# Altium PCB TX_Board.PcbDoc (part 5 of 5)
Units mm, origin at the board's own origin, x right, y up, seen from the top; angles counter-clockwise.
Board outline 69 x 69 mm, 4 copper layers (Top Layer, Int1 (GND), Int2 (GND), Bottom Layer), stack 1.591 mm thick; 102 components, 48 nets, 289 pads, 82 vias.
Unrouted connection lines stored in the file: 40.
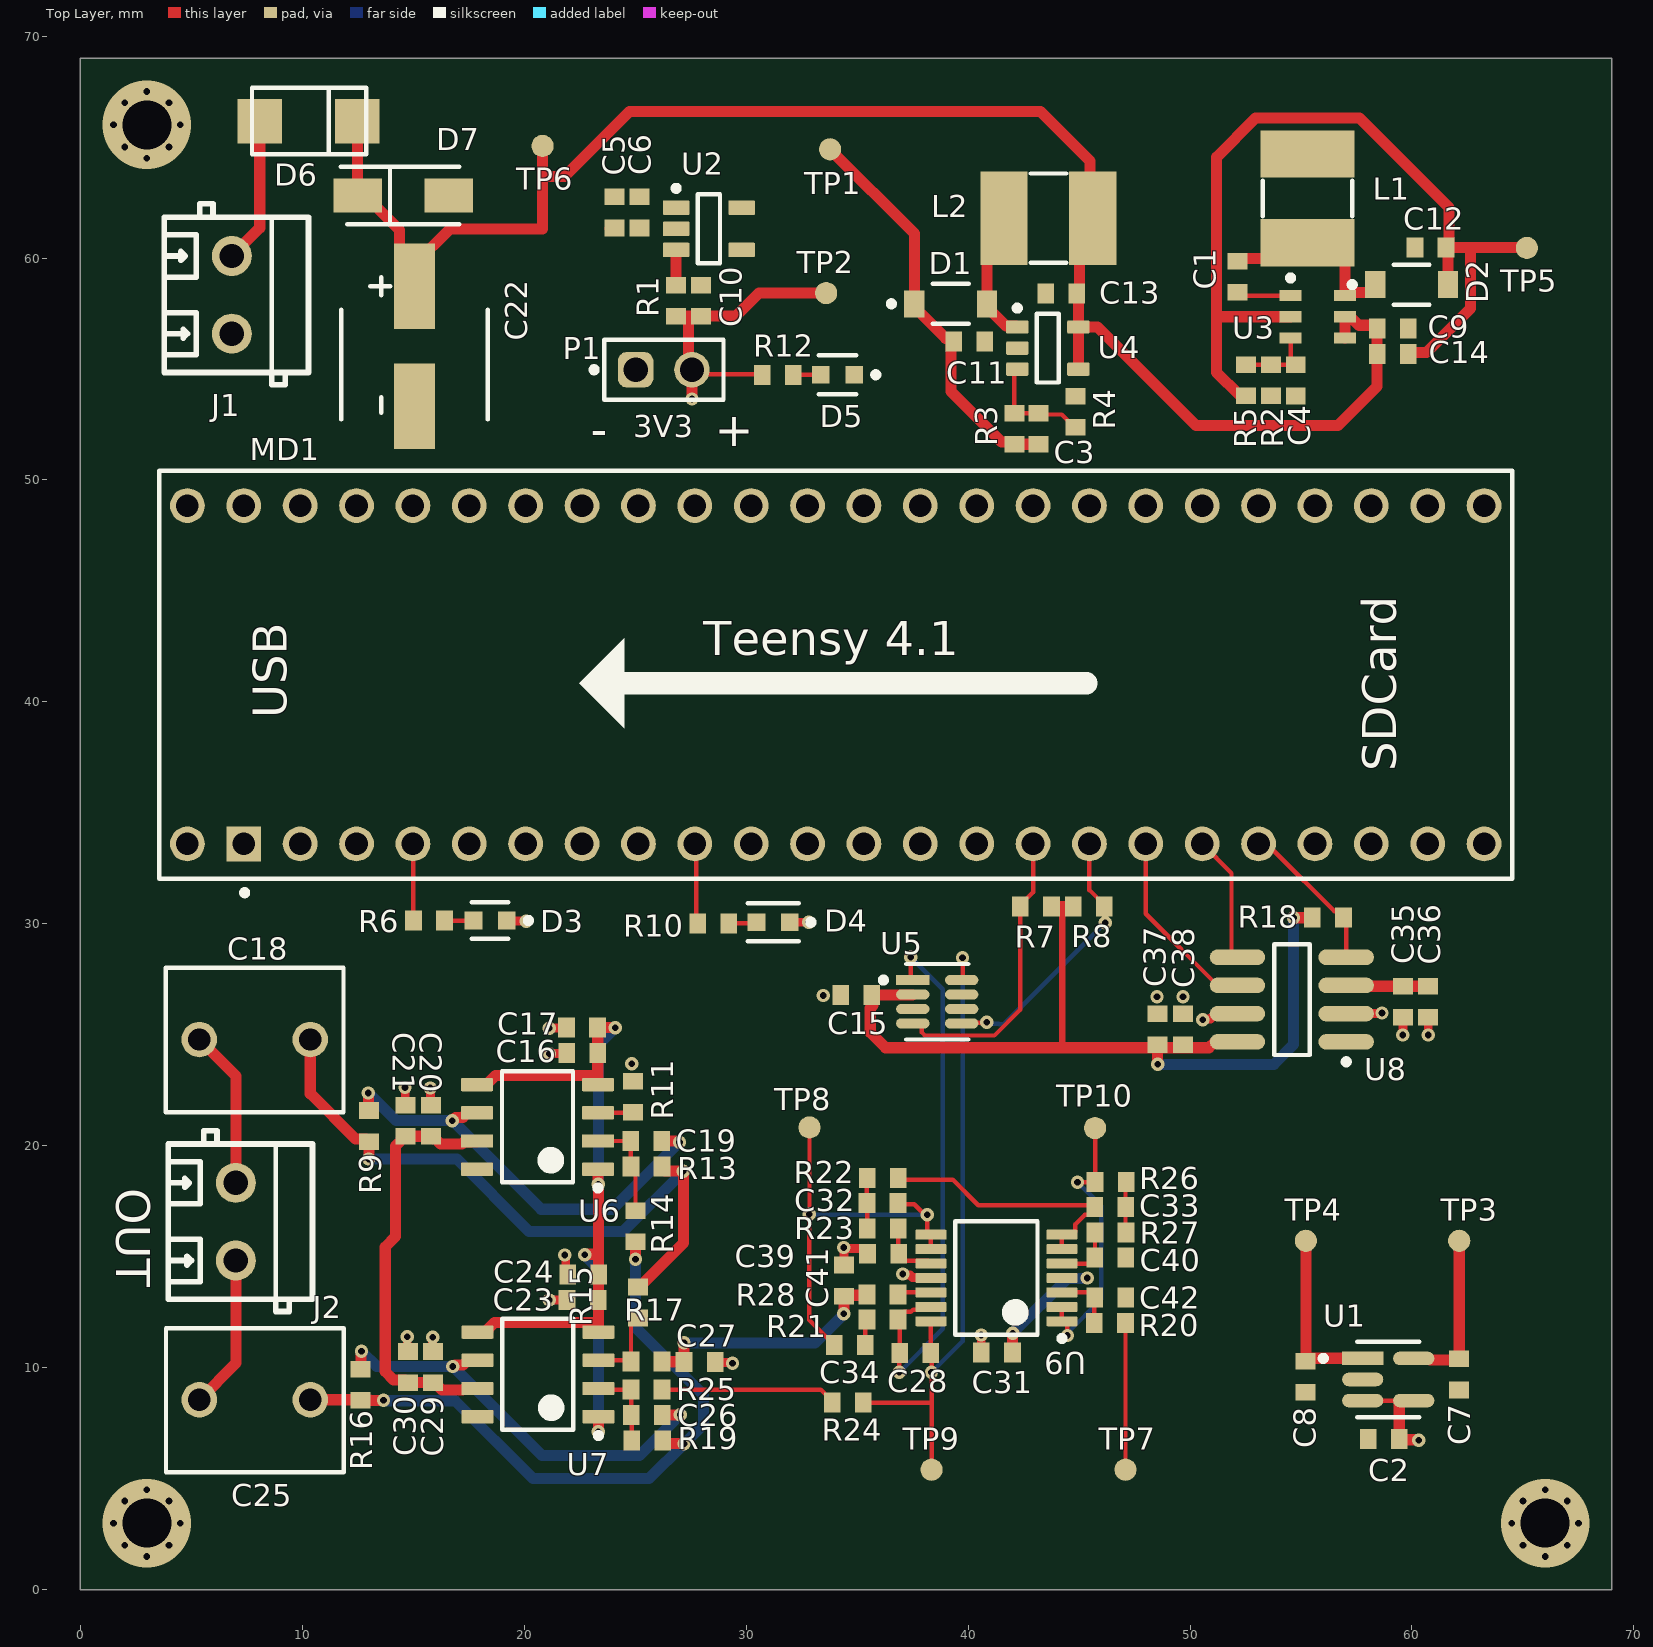
[diagram p0: Top Layer view]

## Via types
v1: diameter 0.6, hole 0.3, Top Layer to Bottom Layer, tented both sides, 79 vias
v2: diameter 4, hole 2.2, Top Layer to Bottom Layer, 3 vias

## Nets (pads, with @x,y where several pads share a name; then routed paths per layer and width w, separated by ;. In a path a pad name is that pad's centre, name@x,y a point inside that pad or via, vN(x,y) a via of type N, cw(c..) or ccw(c..) an arc to the next point about the centre after c; other vN are vias at no path point) (continued)
GND: C2.2 C4.2 C5.1 C6.2 C7.2 C8.2 C9.1 C10.1 C11.1 C12.2 C13.1 C15.2 C16.2 C17.1 C20.2 C21.1 C22.2 C23.2 C24.1 C27.2 C29.2 C30.1 C31.2 C35.2 C36.1 C37.1 C38.2 C39.1 C40.1 C41.2 C42.1 D3.1 D4.1 D5.1 D7.2 J1.2 L1.2 MD1.43 MD1.45 MD1.46 P1.1 R2.2 R4.1 R11.1 U1.2 U2.1 U4.2 U5.3 U5.6 U8.2 U8.7 U9.11 | length 18.1
  Top Layer w0.4: v1(14.63,22.631) 14.643,22.619 14.643,21.846 C21.1 ; C30.1@14.732,10.606 v1(14.732,11.405) ; v1(15.773,22.606) 15.786,22.593 15.786,21.846 C20.2 ; C29.2@15.875,10.606 v1(15.875,11.379) ; D3.1 19.23,30.137 20.079,30.137 v1(20.091,30.124) ; v1(21.133,13.056) C23.2 ; v1(21.133,24.155) 21.145,24.168 21.904,24.168 C16.2 ; v1(21.133,25.298) 21.145,25.311 21.893,25.311 C17.1 ; v1(21.833,15.085) 21.871,15.047 21.871,14.284 C24.1 ; C27.2 28.629,10.236 29.362,10.236 v1(29.388,10.211) ; D4.1 v1(32.817,30.074) ; C41.2 34.404,14.643 34.404,15.405 v1(34.392,15.418) 34.43,15.38 35.295,15.38 35.47,15.205 C39.1 ; v1(37.059,14.224) 37.097,14.186 37.376,14.186 37.49,14.071 38.302,14.071 U9.11 ; v1(40.589,11.481) 40.595,11.475 40.595,10.699 C31.2 ; v1(50.571,25.679) 50.61,25.718 50.916,25.718 51.155,25.956 U8.7 ; U8.2 57.05,25.97 58.635,25.97 v1(58.649,25.984) ; v1(59.588,24.994) C35.2 ; v1(60.731,24.994) C36.1
  other v1: 24.841,23.698 48.514,26.721 49.682,26.721 33.477,26.772
HYD_N: C25.2 J2.2 | length 7
  Top Layer w0.5: C25.2 7.012,10.207 J2.2
HYD_P: C18.2 J2.1 | length 7.1
  Top Layer w0.5: C18.2 7.012,23.141 J2.1
I2C2_SCL: MD1.24 R7.1 U5.4 | length 13.4
  Top Layer w0.2: U5.4 37.802,25.517 37.92,25.399 37.92,25.107 38.057,24.97 41.187,24.97 42.344,26.126 R7.1@42.344,30.785 ; R7.1@42.344,30.835 42.928,31.419 MD1.24
I2C2_SDA: MD1.25 R8.1 U5.5 | length 12.3
  Top Layer w0.2: U5.5 39.737,25.543 40.819,25.543 v1(40.845,25.57) ; MD1.25 45.468,31.523 46.157,30.835 46.157,30.785 46.168,30.774 46.168,30.059 v1(46.179,30.048)
  Bottom Layer w0.2: v1(40.845,25.57) 40.922,25.493 41.39,25.493 41.407,25.476 41.607,25.476 v1(46.179,30.048)
IBuck_CB: C1.1 U3.1 | length 2.4
  Top Layer w0.2: C1.1@52.146,58.329 52.172,58.303 U3.1
IBUCK_FB: C4.1 R2.1 R5.2 U3.3 | length 3.6
  Top Layer w0.2: R5.2 54.748,55.197 C4.1 54.53,55.416 U3.3
IBuck_SW: C1.2 D2.1 L1.1 U3.6 | length 8.7
  Top Layer w0.5: C1.2@52.146,59.984 54.593,59.984 L1.1 56.168,60.687 56.98,59.875 U3.6 57.23,58.303 57.368,58.441 58.137,58.441 58.344,58.649 D2.1
LED_HB: MD1.8 R10.1 | length 3.6
  Top Layer w0.2: MD1.8 27.744,33.548 27.744,30.079 R10.1@27.801,30.023
LED_TX: MD1.3 R6.1 | length 3.5
  Top Layer w0.2: MD1.3 14.993,33.599 14.993,30.155 R6.1@14.999,30.15
LPF_OUT: C32.2 C34.1 TP8.1 U9.8 U9.9 | length 18.8
  Top Layer w0.2: TP8.1 32.856,16.93 v1(32.842,16.916) 32.842,12.152 C34.1 ; C32.2 36.899,17.369 37.574,17.369 38.052,16.891 v1(38.16,16.891) 38.16,16.121 38.285,15.996 U9.8 U9.9
  Bottom Layer w0.2: v1(32.842,16.916) 32.855,16.904 38.148,16.904 v1(38.16,16.891)
NetC19_1: C19.1 R13.2 R14.2 U6.2 | length 4.7
  Top Layer w0.2: U6.2 C19.1 24.802,19.085 R13.2 25.017,18.869 R14.2
NetC26_1: C26.1 R19.1 R25.2 U7.2 | length 3.7
  Top Layer w0.2: U7.2 23.397,9.015 R25.2 ; C26.1 R25.2@24.827,9.001 ; R19.1 C26.1@24.841,7.86
NetC32_1: C32.1 R22.2 R23.1 | length 2.3
  Top Layer w0.2: R22.2 35.444,18.531 C32.1 35.458,17.41 R23.1
NetC33_1: C33.1 R26.2 R27.1 | length 2.3
  Top Layer w0.2: R27.1@47.092,15.848 47.092,18.11 R26.2@47.094,18.112
NetC33_2: C33.2 R22.1 U9.6 U9.7 | length 12.3
  Top Layer w0.2: R22.1 36.93,18.467 39.318,18.467 40.463,17.322 45.631,17.322 C33.2 45.706,17.172 45.431,16.897 45.263,16.897 44.827,16.46 44.827,16.121 44.702,15.996 U9.7 U9.6
NetC34_2: C34.2 R21.1 | length 1.2
  Top Layer w0.2: C34.2 35.371,12.093 R21.1
NetC39_2: C39.2 R23.2 U9.10 | length 2.8
  Top Layer w0.2: R23.2 36.858,15.15 C39.2 ; C39.2@36.87,15.099 37.145,14.824 37.485,14.824 37.488,14.821 38.202,14.821 U9.10
NetC40_2: C40.2 R27.2 U9.5 | length 2.7
  Top Layer w0.2: U9.5 45.441,14.696 C40.2 45.717,14.972 R27.2
NetD3_2: D3.2 R6.2 | length 1.3
  Top Layer w0.2: R6.2@16.399,30.15 D3.2
NetD4_2: D4.2 R10.2 | length 1.3
  Top Layer w0.2: R10.2@29.201,30.023 30.418,30.023 D4.2
NetD5_2: D5.2 R12.2 | length 1.3
  Top Layer w0.2: R12.2@32.107,54.737 D5.2@33.364,54.737
NetR11_2: R11.2 U6.3 | length 1.6
  Top Layer w0.2: U6.3 24.871,21.488 R11.2
NetR15_1: R15.1 R17.2 U7.3 | length 3.6
  Top Layer w0.2: U7.3 24.76,10.338 R17.2 24.813,11.968 25.088,12.243 R15.1
NetR24_2: R24.2 R25.1 | length 8
  Top Layer w0.2: R25.1 33.372,9.015 33.881,8.506 R24.2
NetR28_2: R28.2 U9.12 | length 1.5
  Top Layer w0.2: R28.2 36.931,13.396 U9.12
POT_W: C28.1 R21.2 U5.1 U9.13 | length 25.3
  Top Layer w0.2: R21.2 36.917,12.093 C28.1 36.906,10.657 v1(36.906,9.804) ; R21.2@36.844,12.242 37.119,12.517 37.427,12.517 37.532,12.621 38.202,12.621 U9.13 ; v1(37.414,28.499) 37.414,27.562 U5.1
  Bottom Layer w0.2: v1(36.906,9.804) 38.862,11.76 38.862,27.051 v1(37.414,28.499)
REF_1V5: C8.1 C27.1 C41.1 R17.1 R28.1 TP4.1 U1.1 | length 19.4
  Top Layer w0.5: R17.1 26.225,10.273 27.192,10.273 C27.1 v1(27.203,11.125) ; v1(34.404,12.433) 34.404,13.218 C41.1 34.457,13.27 35.405,13.27 R28.1 ; TP4.1 55.22,10.454 55.194,10.429 U1.1@57.78,10.429
  Bottom Layer w0.5: v1(27.203,11.125) 33.096,11.125 v1(34.404,12.433)
REF_3V: C7.1 C31.1 C35.1 C36.2 TP3.1 U1.5 U8.3 U9.4 | length 16.4
  Top Layer w0.25: U9.4 U9.4@44.232,14.041
  Top Layer w0.5: C31.1 42.006,10.699 42.006,11.551 v1(42.012,11.557) ; U8.3 57.071,27.192 C36.2 ; U1.5 60.732,10.424 60.803,10.353 62.078,10.353 C7.1 TP3.1
  Bottom Layer w0.5: v1(42.012,11.557) 44.482,14.027 45.345,14.027 v1(45.364,14.046)
SPI1_CS: MD1.28 R18.1 U8.4 | length 7.2
  Top Layer w0.2: MD1.28 53.459,33.604 53.836,33.227 53.845,33.227 56.494,30.577 56.812,30.577 57.04,30.349 57.04,30.277 57.036,30.273 U8.4
SPI1_MOSI: MD1.26 U8.6 | length 8.6
  Top Layer w0.2: MD1.26 48.008,30.455 51.236,27.226 U8.6
SPI1_SCK: MD1.27 U8.5 | length 5.8
  Top Layer w0.2: MD1.27 51.869,32.283 51.869,28.727 52.1,28.496 U8.5
TXLVL_OUT: C28.2 R24.1 TP9.1 U5.8 U9.14 | length 30
  Top Layer w0.2: R24.1 38.354,8.431 ; U9.14 38.327,10.677 C28.2 38.354,10.631 v1(38.354,9.804) 38.354,8.431 ; TP9.1 38.354,8.431 ; U5.8 39.751,27.508 v1(39.751,28.473)
  Bottom Layer w0.2: v1(38.354,9.804) 39.751,11.201 v1(39.751,28.473)
VDD: C3.2 C11.2 C20.1 C21.2 C29.1 C30.2 D1.1 R3.2 TP1.1 U6.7 U7.7 | length 36.9
  Top Layer w0.5: C29.1 C30.2 14.632,9.458 14.11,9.458 13.741,9.827 13.741,15.443 14.207,15.909 14.207,19.984 14.456,20.233 14.456,20.308 14.581,20.433 C20.1 15.924,20.308 15.999,20.308 16.224,20.083 17.199,20.083 17.285,20.168 17.826,20.168 U6.7 ; C29.1@15.975,9.333 16.3,9.008 17.224,9.008 17.234,9.018 17.844,9.018 U7.7 ; TP1.1 37.579,61.1 D1.1 ; D1.1@37.579,57.785 38.979,56.386 39.15,56.386 39.228,56.308 39.228,53.99 41.514,51.704 42.057,51.704 R3.2@42.058,51.703 ; R3.2 C3.2
VIN: C5.2 C6.1 C9.2 C13.2 C14.2 C22.1 D6.K D7.1 L2.1 TP6.1 U2.2 U3.4 U3.5 U4.4 U4.5 | length 77.6
  Top Layer w0.5: D6.K 12.487,62.831 D7.1 12.829,62.814 14.387,61.256 14.387,59.4 C22.1 15.062,59.725 16.648,61.311 20.828,61.311 20.828,63.856 ; TP6.1 20.828,63.856 ; C5.2@23.876,61.337 C5.2@23.881,61.332 ; C6.1@25.192,61.357 C6.1 ; U4.4 U4.5 ; U3.4 U3.5 57.23,57.353 57.613,56.97 58.226,56.97 C9.2@58.303,56.892 ; C9.2 58.431,54.215 56.667,52.451 50.267,52.451 45.827,56.891 U4.5 ; 20.828,63.856 21.006,63.678 21.819,63.678 24.74,66.599 43.256,66.599 45.49,64.365 45.49,61.927 L2.1 45.022,61.202 45.022,58.521 C13.2 44.967,58.324 U4.5
VIN_Supply: D6.A J1.1 | length 6.6
  Top Layer w0.5: J1.1 8.087,61.346 D6.A
VSS: C12.1 C14.1 C16.1 C17.2 C23.1 C24.2 D2.2 R5.1 TP5.1 U3.2 U6.1 U6.4 U6.5 U7.1 U7.4 U7.5 | length 80.2
  Top Layer w0.5: U6.5 17.926,22.808 18.351,22.808 18.707,23.165 23.316,23.165 ; U7.5 18.319,11.608 18.369,11.658 18.369,11.747 18.662,12.04 23.198,12.04 23.351,12.192 ; v1(22.733,15.095) 22.752,15.114 23.325,15.114 23.35,15.138 ; U6.1 23.334,18.94 23.334,18.271 v1(23.343,18.263) 23.35,18.255 23.35,15.138 ; U6.4 23.316,22.768 23.316,23.165 ; v1(23.343,7.112) 23.343,7.113 U7.1 U7.1 ; U7.4 23.351,11.614 23.351,12.192 ; v1(24.105,25.324) C17.2 23.316,25.314 23.316,23.165 ; R5.1@52.576,53.695 52.451,53.82 52.225,53.82 51.196,54.849 51.196,57.353 ; U3.2 51.196,57.353 ; C14.1 59.9,55.746 60.648,55.746 62.636,57.734 62.636,60.477 ; C12.1 61.62,60.39 D2.2 ; TP5.1@65.176,60.477 62.636,60.477 ; 23.35,15.138 23.35,14.206 C24.2 23.351,14.192 23.351,12.192 ; 51.196,57.353 51.196,64.537 52.958,66.299 57.634,66.299 61.661,62.272 61.661,60.477 62.636,60.477
  Bottom Layer w0.5: v1(22.733,15.095) 22.733,15.068 23.343,14.458 v1(23.343,7.112) ; v1(23.343,18.263) 23.343,24.562 v1(24.105,25.324)
pads on no net: MD1.0 MD1.1 MD1.2 MD1.4 MD1.5 MD1.6 MD1.7 MD1.9 MD1.10 MD1.11 MD1.12 MD1.13 MD1.14 MD1.15 MD1.16 MD1.17 MD1.18 MD1.19 MD1.20 MD1.21 MD1.22 MD1.23 MD1.29 MD1.30 MD1.31 MD1.32 MD1.33 MD1.34 MD1.35 MD1.36 MD1.37 MD1.38 MD1.39 MD1.40 MD1.41 MD1.42 MD1.44 MD1.47 U2.4 U2.5 U5.7 U6.8 U7.8
copper on no net:
  other v1: 3,1.5 66,1.5 2,2 4,2 65,2 67,2 1.5,3 4.5,3 64.5,3 67.5,3 2,4 4,4 65,4 67,4 3,4.5 66,4.5 3,64.5 2,65 4,65 1.5,66 4.5,66 2,67 4,67 3,67.5
  other v2: 3,3 66,3 3,66

## Polygon pours and split planes (outlines as drawn)
GND on Int1 (GND) "GND_L02_P000" (solid, pour order 0): 0,0 0,69 69,69 69,0
GND on Int2 (GND) "GND_L03_P001" (solid, pour order 1): 0,0 0,69 69,69 69,0

## Silkscreen, mask and mechanical layers (free items; w line width, h text height)
Top Overlay:
  region: 22.481,40.843 24.513,38.811 24.513,42.875
  lines w1: 23.751,40.843 45.341,40.843
  text "3V3" at 24.917,51.915 h1
  text "-" at 22.989,51.511 h1.52
  text "+" at 28.577,51.511 h1.52
  text "Teensy 4.1" at 28.069,42.113 h1.52
  text "USB" at 9.298,39.268 h1.52 r90
  text "SDCard" at 59.285,36.881 h1.52 r90
  text "OUT" at 1.626,18.085 h1.52 r270
Mechanical 1:
  the board outline again, w0.254